# EAGLE board zlacza (EAGLE 4.13)
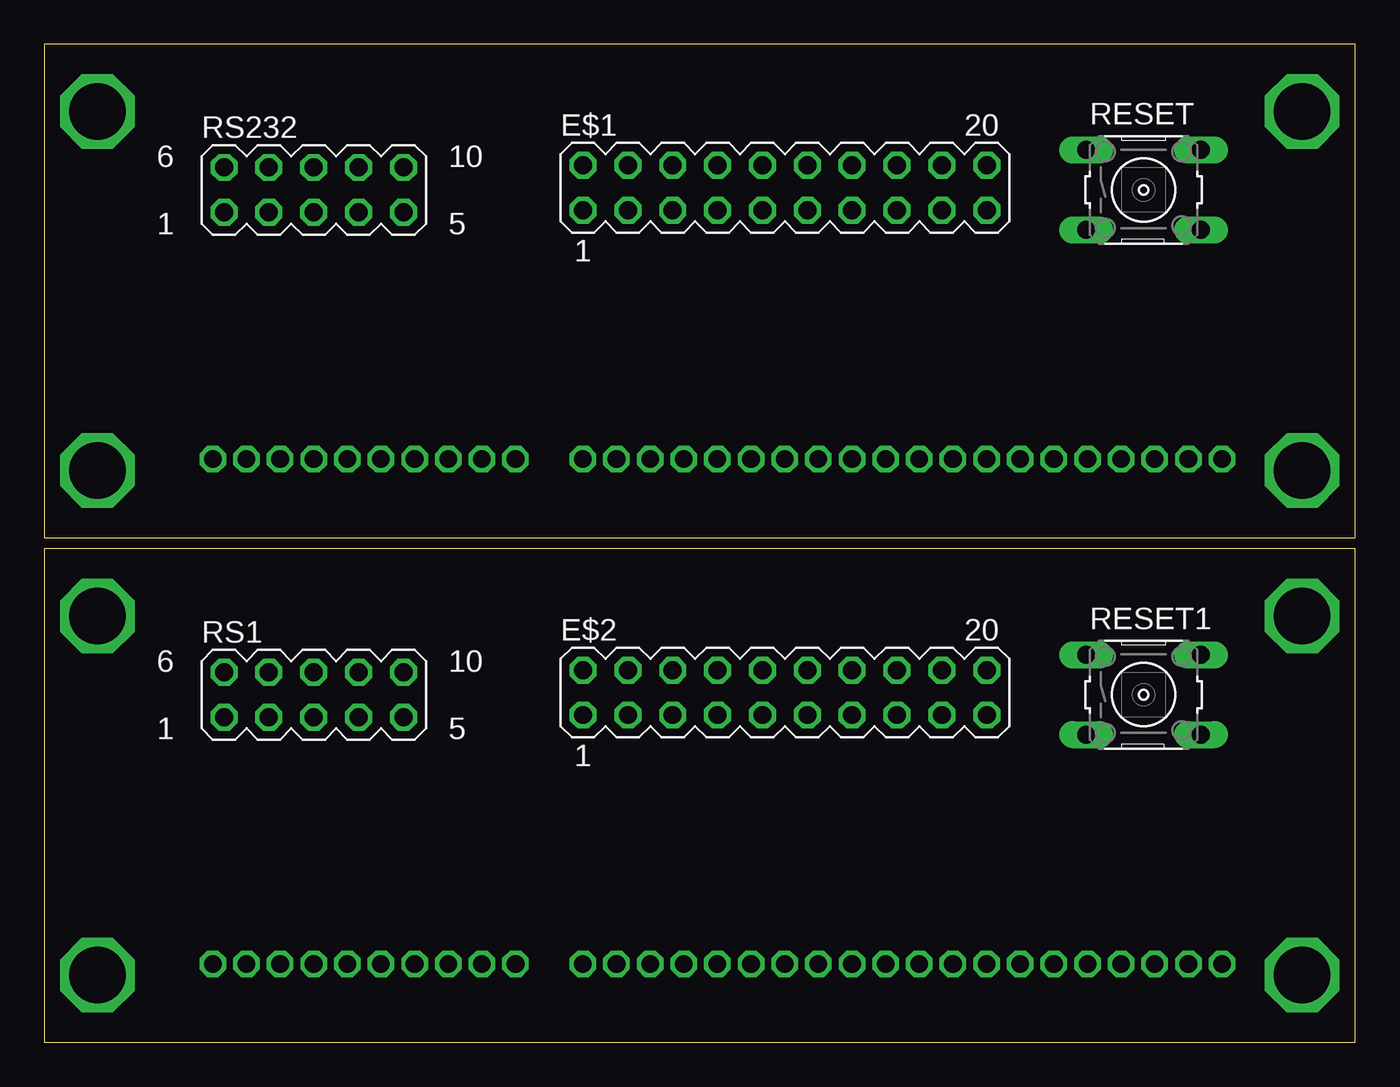
[diagram p0: board, top side]
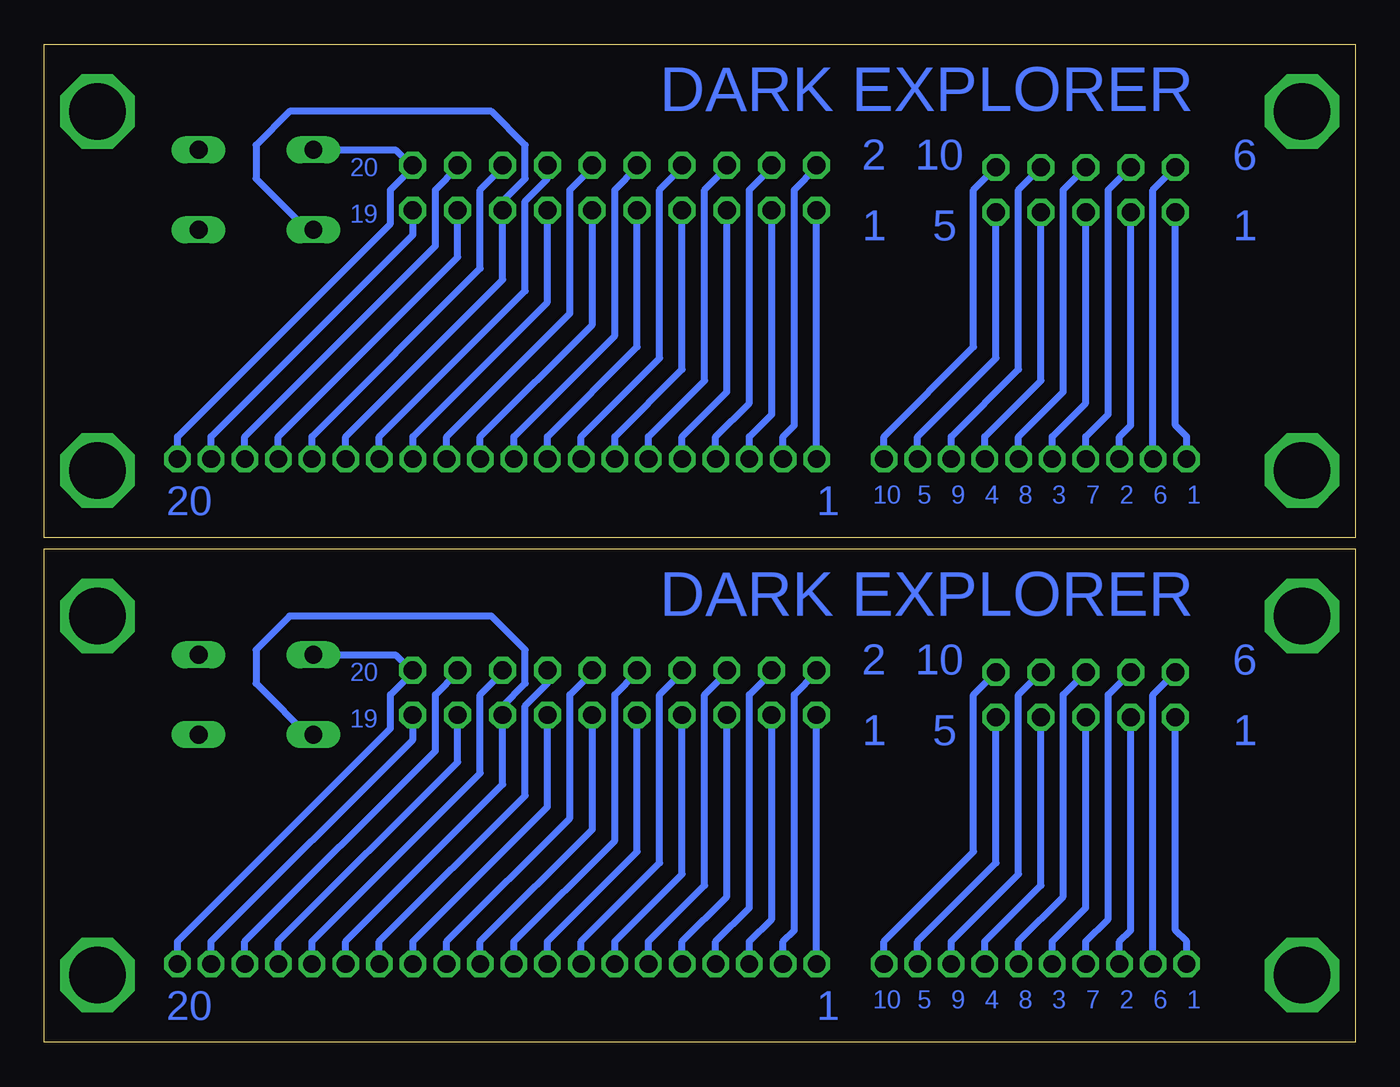
[diagram p1: board, bottom side, seen from below]

Size 74.25 x 56.5 mm. Coordinates in mm from the lower left corner, seen from the top.
Outline: 0,28.58 74.25,28.58 74.25,56.5 0,56.5 0,28.58
Outline: 0,0 74.25,0 74.25,27.93 0,27.93 0,0
Copper layers (1*16): Top 0.035mm / dielectric 1.5mm / Bottom 0.035mm
Design rules "default": minimum track width 10mil, minimum drill 24mil, track to track 8mil, track to pad 8mil, pad to pad 8mil, via to via 8mil, smd to smd 8mil, copper to edge 40mil, drill to drill 8mil, minimum pad ring 10mil, minimum via ring 8mil, stop-mask expansion 4mil, vias tented up to drill 0mil, thermal gap 10mil

## Footprints (pad centres in the part's own frame; a part is rotated, then mirrored left to right if it is on the bottom)
MA10-2 = drill 1.016 octagon: 1 -11.43,-1.27; 2 -11.43,1.27; 3 -8.89,-1.27; 4 -8.89,1.27; 5 -6.35,-1.27; 6 -6.35,1.27; 7 -3.81,-1.27; 8 -3.81,1.27; 9 -1.27,-1.27; 10 -1.27,1.27; 11 1.27,-1.27; 12 1.27,1.27; 13 3.81,-1.27; 14 3.81,1.27; 15 6.35,-1.27; 16 6.35,1.27; 17 8.89,-1.27; 18 8.89,1.27; 19 11.43,-1.27; 20 11.43,1.27
B3F-10XX = drill 1.016 long: 1 -3.251,2.261; 2 3.251,2.261; 3 -3.251,-2.261; 4 3.251,-2.261
MA05-2V2 = drill 1.016 octagon: 1 -5.08,-1.27; 2 -2.54,-1.27; 3 0,-1.27; 4 2.54,-1.27; 5 5.08,-1.27; 6 -5.08,1.27; 7 -2.54,1.27; 8 0,1.27; 9 2.54,1.27; 10 5.08,1.27

## Placement (x,y rotation side)
E$1  [MA10-2]  41.95,48.38 0 top
E$2  [MA10-2]  41.95,19.8 0 top
RESET  [B3F-10XX]  62.26,48.26 0 top
RESET1  [B3F-10XX]  62.26,19.68 0 top
RS1  MA05-2V2  [MA05-2V2]  15.27,19.68 0 top
RS232  MA05-2V2  [MA05-2V2]  15.27,48.26 0 top

## Library data of the parts
E$1 E$2 RS1 RS232 = con-lstb
RESET RESET1 = switch-omron

## Nets
#RESET: E$1.20 RESET.1
#RESET1: E$2.20 RESET1.1
N$20: RS1.1
N$21: RS1.6
N$22: RS1.2
N$23: RS1.7
N$24: RS1.3
N$25: RS1.8
N$26: RS1.4
N$27: RS1.9
N$28: RS1.5
N$29: RS1.10
N$51: RS232.1
N$52: RS232.6
N$53: RS232.2
N$54: RS232.7
N$55: RS232.3
N$56: RS232.8
N$57: RS232.4
N$58: RS232.9
N$59: RS232.5
N$60: RS232.10
S$5: E$1.15 RESET.3
S$6: E$1.1
S$11: E$2.15 RESET1.3
S$12: E$2.1

## Tracks (layer width: path | path; a pad name or v marks a point on that pad's centre or on a via)
#RESET
  Bottom 0.406: 53.37,49.52 53.38,49.53 | 53.38,49.53 E$1.20 | RESET.1 54.36,50.52 53.38,49.53
#RESET1
  Bottom 0.406: 53.37,20.95 53.38,20.96 | 53.38,20.96 E$2.20 | RESET1.1 54.36,21.94 53.38,20.96
N$1  (via drill 1)
  Bottom 0.406: 43.2,20.95 44.48,19.68 44.48,12.7 51.46,5.71 v51.46,4.44
N$2  (via drill 1)
  Bottom 0.406: 30.51,20.95 31.77,19.68 31.77,6.35 32.41,5.71 v32.41,4.44
N$3  (via drill 1)
  Bottom 0.406: v30.51,4.44 30.51,18.41
N$4  (via drill 1)
  Bottom 0.406: 33.05,18.41 33.05,6.98 34.31,5.71 v34.31,4.44
N$5  (via drill 1)
  Bottom 0.406: 33.05,20.95 34.31,19.68 34.31,7.62 36.22,5.71 v36.22,4.44
N$6  (via drill 1)
  Bottom 0.406: 35.59,18.41 35.59,8.25 38.12,5.71 v38.12,4.44
N$7  (via drill 1)
  Bottom 0.406: 35.59,20.95 36.85,19.68 36.85,8.89 40.03,5.71 v40.03,4.44
N$8  (via drill 1)
  Bottom 0.406: 38.12,18.41 38.12,9.52 41.94,5.71 v41.94,4.44
N$9  (via drill 1)
  Bottom 0.406: 38.12,20.95 39.4,19.68 39.4,10.16 43.84,5.71 v43.84,4.44
N$10  (via drill 1)
  Bottom 0.406: 40.66,18.41 40.66,10.79 45.74,5.71 v45.74,4.44
N$11  (via drill 1)
  Bottom 0.406: 43.2,18.41 43.2,12.06 49.55,5.71 v49.55,4.44
N$12  (via drill 1)
  Bottom 0.406: 45.74,18.41 45.74,13.33 53.37,5.71 v53.37,4.44
N$13  (via drill 1)
  Bottom 0.406: v55.27,4.44 55.27,5.71 47.02,13.96 47.02,19.05 45.74,20.32 45.74,20.95
N$14  (via drill 1)
  Bottom 0.406: v57.17,4.44 57.17,5.71 48.29,14.6 48.29,18.41
N$15  (via drill 1)
  Bottom 0.406: 48.29,20.95 49.55,19.68 49.55,15.23 59.08,5.71 v59.08,4.44
N$16  (via drill 1)
  Bottom 0.406: 50.83,18.41 50.83,15.87 60.99,5.71 v60.99,4.44
N$17  (via drill 1)
  Bottom 0.406: 50.83,20.95 52.09,19.68 52.09,16.5 62.89,5.71 v62.89,4.44
N$18  (via drill 1)
  Bottom 0.406: 53.37,18.41 53.37,17.14 64.79,5.71 v64.79,4.44
N$19  (via drill 1)
  Bottom 0.406: 53.37,20.95 54.63,19.68 54.63,17.77 66.7,5.71 v66.7,4.44
N$20  (via drill 1)
  Bottom 0.406: RS1.1 10.19,6.35 9.55,5.71 v9.55,4.44
N$21  (via drill 1)
  Bottom 0.406: RS1.6 11.46,19.68 v11.46,4.44
N$22  (via drill 1)
  Bottom 0.406: RS1.2 12.73,6.35 13.36,5.71 v13.36,4.44
N$23  (via drill 1)
  Bottom 0.406: RS1.7 14,19.68 14,6.98 15.27,5.71 v15.27,4.44
N$24  (via drill 1)
  Bottom 0.406: RS1.3 15.27,7.62 17.17,5.71 v17.17,4.44
N$25  (via drill 1)
  Bottom 0.406: RS1.8 16.54,19.68 16.54,8.25 19.07,5.71 v19.07,4.44
N$26  (via drill 1)
  Bottom 0.406: RS1.4 17.8,8.89 20.98,5.71 v20.98,4.44
N$27  (via drill 1)
  Bottom 0.406: RS1.9 19.07,19.68 19.07,9.52 22.89,5.71 v22.89,4.44
N$28  (via drill 1)
  Bottom 0.406: RS1.5 20.34,10.16 24.79,5.71 v24.79,4.44
N$29  (via drill 1)
  Bottom 0.406: RS1.10 21.62,19.68 21.62,10.79 26.7,5.71 v26.7,4.44
N$30  (via drill 1)
  Bottom 0.406: 40.66,20.95 41.94,19.68 41.94,11.43 47.65,5.71 v47.65,4.44
N$31  (via drill 1)
  Bottom 0.406: v30.51,33.02 30.51,46.98
N$33  (via drill 1)
  Bottom 0.406: 33.05,46.98 33.05,35.55 34.31,34.28 v34.31,33.02
N$34  (via drill 1)
  Bottom 0.406: 33.05,49.52 34.31,48.26 34.31,36.19 36.22,34.28 v36.22,33.02
N$35  (via drill 1)
  Bottom 0.406: 35.59,46.98 35.59,36.83 38.12,34.28 v38.12,33.02
N$36  (via drill 1)
  Bottom 0.406: 35.59,49.52 36.85,48.26 36.85,37.46 40.03,34.28 v40.03,33.02
N$37  (via drill 1)
  Bottom 0.406: 38.12,46.98 38.12,38.09 41.94,34.28 v41.94,33.02
N$38  (via drill 1)
  Bottom 0.406: 38.12,49.52 39.4,48.26 39.4,38.73 43.84,34.28 v43.84,33.02
N$39  (via drill 1)
  Bottom 0.406: 40.66,46.98 40.66,39.37 45.74,34.28 v45.74,33.02
N$40  (via drill 1)
  Bottom 0.406: 40.66,49.52 41.94,48.26 41.94,40 47.65,34.28 v47.65,33.02
N$41  (via drill 1)
  Bottom 0.406: 43.2,46.98 43.2,40.63 49.55,34.28 v49.55,33.02
N$43  (via drill 1)
  Bottom 0.406: 45.74,46.98 45.74,41.91 53.37,34.28 v53.37,33.02
N$44  (via drill 1)
  Bottom 0.406: v55.27,33.02 55.27,34.28 47.02,42.54 47.02,47.62 45.74,48.89 45.74,49.52
N$45  (via drill 1)
  Bottom 0.406: v57.17,33.02 57.17,34.28 48.29,43.17 48.29,46.98
N$46  (via drill 1)
  Bottom 0.406: 48.29,49.52 49.55,48.26 49.55,43.81 59.08,34.28 v59.08,33.02
N$47  (via drill 1)
  Bottom 0.406: 50.83,46.98 50.83,44.45 60.99,34.28 v60.99,33.02
N$48  (via drill 1)
  Bottom 0.406: 50.83,49.52 52.09,48.26 52.09,45.08 62.89,34.28 v62.89,33.02
N$49  (via drill 1)
  Bottom 0.406: 53.37,46.98 53.37,45.72 64.79,34.28 v64.79,33.02
N$50  (via drill 1)
  Bottom 0.406: 53.37,49.52 54.63,48.26 54.63,46.35 66.7,34.28 v66.7,33.02
N$51  (via drill 1)
  Bottom 0.406: RS232.1 10.19,34.92 9.55,34.28 v9.55,33.02
N$52  (via drill 1)
  Bottom 0.406: RS232.6 11.46,48.26 v11.46,33.02
N$53  (via drill 1)
  Bottom 0.406: RS232.2 12.73,34.92 13.36,34.28 v13.36,33.02
N$54  (via drill 1)
  Bottom 0.406: RS232.7 14,48.26 14,35.55 15.27,34.28 v15.27,33.02
N$55  (via drill 1)
  Bottom 0.406: RS232.3 15.27,36.19 17.17,34.28 v17.17,33.02
N$56  (via drill 1)
  Bottom 0.406: RS232.8 16.54,48.26 16.54,36.83 19.07,34.28 v19.07,33.02
N$57  (via drill 1)
  Bottom 0.406: RS232.4 17.8,37.46 20.98,34.28 v20.98,33.02
N$58  (via drill 1)
  Bottom 0.406: RS232.9 19.07,48.26 19.07,38.09 22.89,34.28 v22.89,33.02
N$59  (via drill 1)
  Bottom 0.406: RS232.5 20.34,38.73 24.79,34.28 v24.79,33.02
N$60  (via drill 1)
  Bottom 0.406: RS232.10 21.62,48.26 21.62,39.37 26.7,34.28 v26.7,33.02
N$100  (via drill 1)
  Bottom 0.406: 43.2,49.52 44.48,48.26 44.48,41.27 51.46,34.28 v51.46,33.02
N$101  (via drill 1)
  Bottom 0.406: 30.51,49.52 31.77,48.26 31.77,34.92 32.41,34.28 v32.41,33.02
S$1  (via drill 3.2)
  other vias: 3.01,52.7
S$2  (via drill 3.2)
  other vias: 71.24,52.7
S$3  (via drill 3.2)
  other vias: 71.24,32.38
S$4  (via drill 3.2)
  other vias: 3.01,32.38
S$5
  Bottom 0.406: E$1.15 48.3,47.61 47.02,48.89 47.02,50.8 48.92,52.7 60.35,52.7 62.26,50.8 62.26,48.89 59.08,45.72 59,45.79 RESET.3
S$7  (via drill 3.2)
  other vias: 3.01,24.12
S$8  (via drill 3.2)
  other vias: 71.24,24.12
S$9  (via drill 3.2)
  other vias: 71.24,3.8
S$10  (via drill 3.2)
  other vias: 3.01,3.8
S$11
  Bottom 0.406: E$2.15 48.3,19.04 47.02,20.32 47.02,22.22 48.92,24.12 60.35,24.12 62.26,22.22 62.26,20.32 59.08,17.14 59,17.22 RESET1.3

## Text on the board
Bottom: DARK EXPLORER | 6 | 10 | 2 | 20 | 19 | 1 | 5 | 1 | 1 | 6 | 2 | 7 | 3 | 8 | 4 | 9 | 5 | 10 | 1 | 20 | DARK EXPLORER | 6 | 10 | 2 | 20 | 19 | 1 | 5 | 1 | 1 | 6 | 2 | 7 | 3 | 8 | 4 | 9 | 5 | 10 | 1 | 20